# EAGLE board 14119-ESP32_LoRa_1_Channel_Gateway-Panel (EAGLE 9.1.0), part 1 of 4
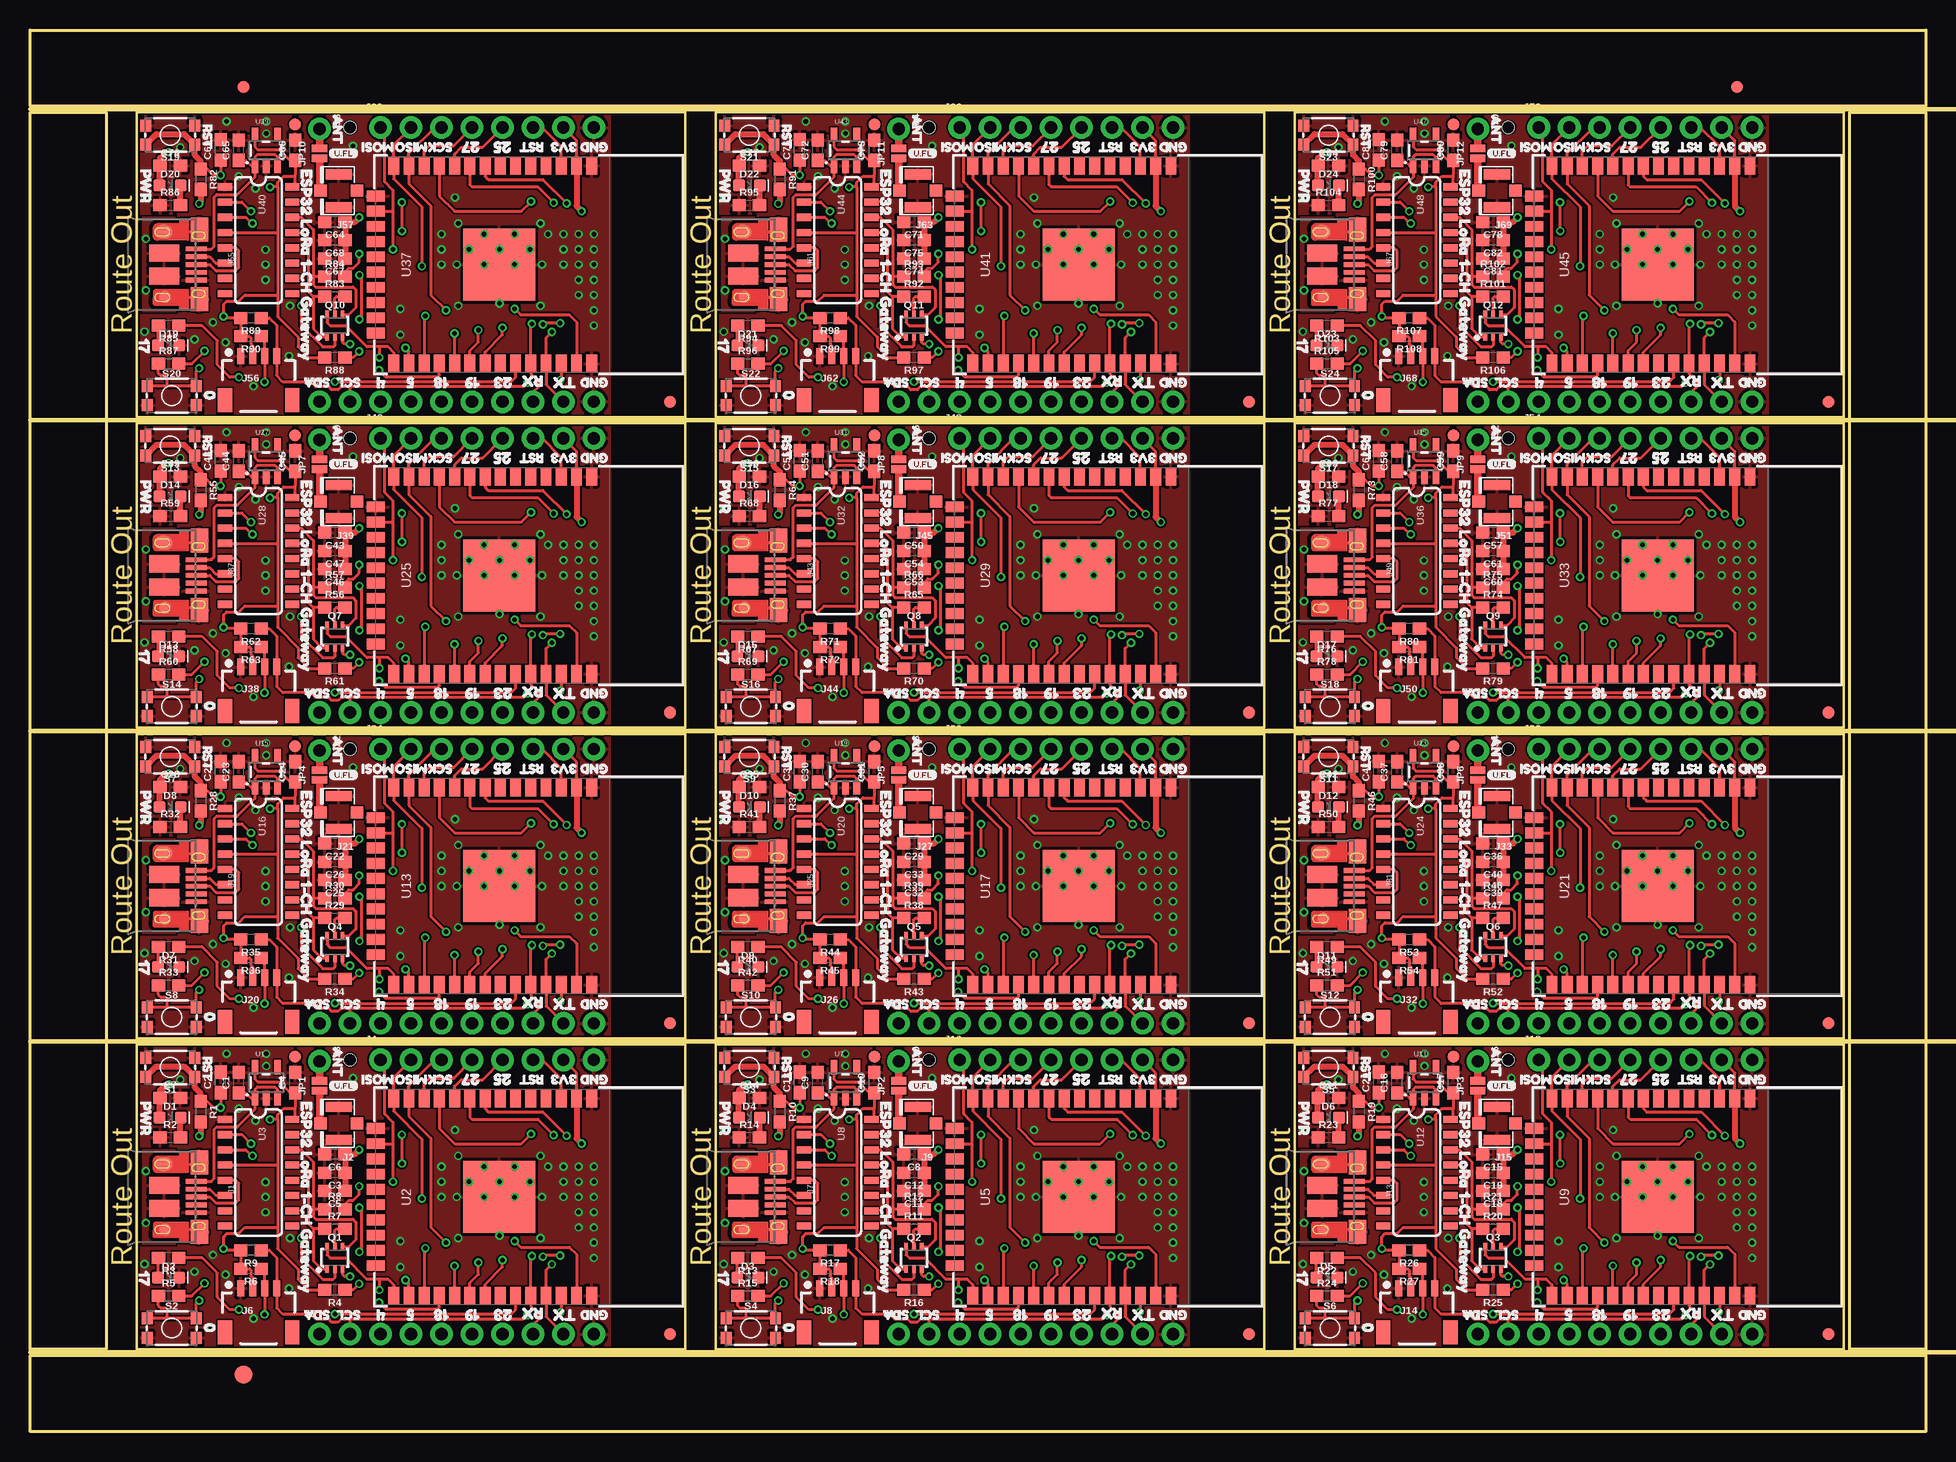
[diagram p0: board, top side]
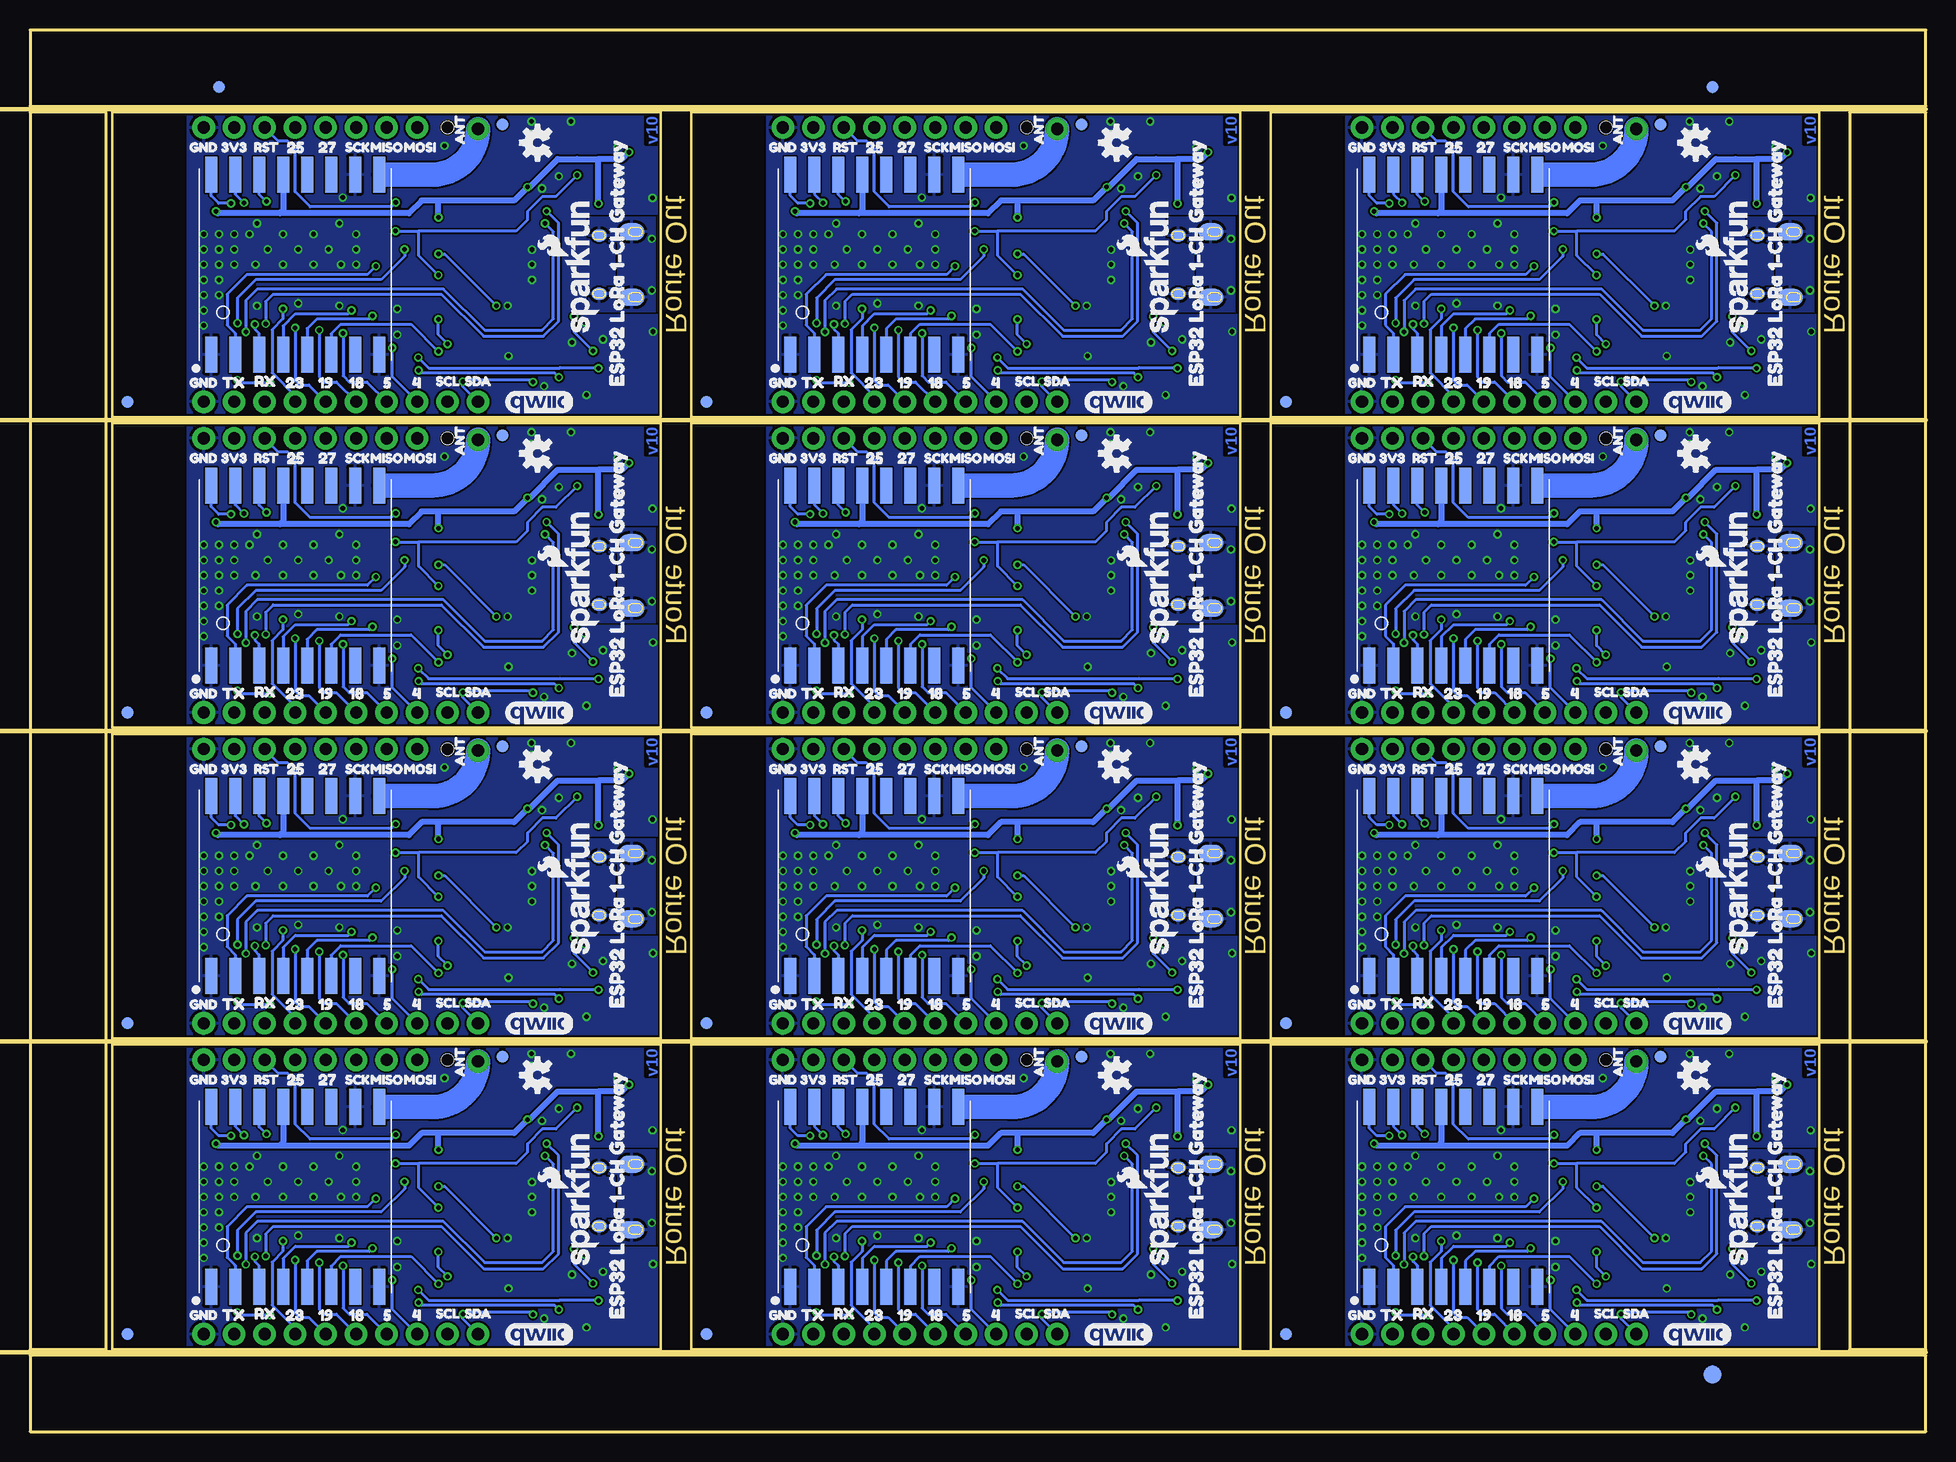
[diagram p1: board, bottom side, seen from below]

Size 157.99 x 116.84 mm. Coordinates in mm from the lower left corner, seen from the top.
Outline: 8.89,32.26 8.89,6.88 54.61,6.86 54.61,32.26 8.89,32.26
Outline: 57.15,32.26 57.15,6.88 102.87,6.86 102.87,32.26 57.15,32.26
Outline: 105.41,32.26 105.41,6.88 151.13,6.86 151.13,32.26 105.41,32.26
Outline: 8.89,58.17 8.89,32.79 54.61,32.77 54.61,58.17 8.89,58.17
Outline: 57.15,58.17 57.15,32.79 102.87,32.77 102.87,58.17 57.15,58.17
Outline: 105.41,58.17 105.41,32.79 151.13,32.77 151.13,58.17 105.41,58.17
Outline: 8.89,84.07 8.89,58.69 54.61,58.67 54.61,84.07 8.89,84.07
Outline: 57.15,84.07 57.15,58.69 102.87,58.67 102.87,84.07 57.15,84.07
Outline: 105.41,84.07 105.41,58.69 151.13,58.67 151.13,84.07 105.41,84.07
Outline: 8.89,109.98 8.89,84.6 54.61,84.58 54.61,109.98 8.89,109.98
Outline: 57.15,109.98 57.15,84.6 102.87,84.58 102.87,109.98 57.15,109.98
Outline: 105.41,109.98 105.41,84.6 151.13,84.58 151.13,109.98 105.41,109.98
Outline: 0,6.35 157.99,6.35 157.99,0 0,0 0,6.35
Outline: 151.64,109.98 157.99,109.98 157.99,6.86 151.64,6.86 151.64,109.98
Outline: 0,116.84 157.99,116.84 157.99,110.49 0,110.49 0,116.84
Outline: 0,109.98 6.35,109.98 6.35,6.86 0,6.86 0,109.98
Copper layers (1*16): Top 0.035mm / dielectric 1.5mm / Bottom 0.035mm
Design rules "SparkFun-2-layer-PCBWay-LIMIT": minimum track width 6mil, minimum drill 0.3mm, track to track 6mil, track to pad 6mil, pad to pad 6mil, via to via 6mil, smd to smd 6mil, copper to edge 6mil, drill to drill 6mil, minimum pad ring 6mil, minimum via ring 6mil, stop-mask expansion 4mil, vias tented up to drill 25mil, thermal gap 10mil
Net classes: 0 default: width 0.152 mm, drill 0.305 mm
Holes 1.02 mm at 26.67,30.99 74.93,30.99 123.19,30.99 26.67,56.9 74.93,56.9 123.19,56.9 26.67,82.8 74.93,82.8 123.19,82.8 26.67,108.71 74.93,108.71 123.19,108.71
Milling: 5 lines

## Footprints (pad centres in the part's own frame; a part is rotated, then mirrored left to right if it is on the bottom)
0603 = smd 1.1 x 1: 1 -0.85,0; 2 0.85,0
LED-0603 = smd 1 x 1: A -0.877,0; C 0.877,0
FIDUCIAL-1X2 = smd 1 x 1: 1 0,0
FIDUCIAL-1.5X3 = smd 1.5 x 1.5: 1 0,0
USB-MICROB-PTH-MILL = smd 0.4 x 1.75: D+ 0,0; D- -0.65,0; GND 1.3,0; ID 0.65,0; VBUS -1.3,0 | smd 2 x 1.46: SHIELD -2.9,0.275; SHIELD2 2.9,0.275 | smd 1.425 x 2.5: SHIELD3 -0.963,-2.675; SHIELD4 0.963,-2.675 | smd 1.4 x 2.1 bottom: SHIELD5 -2.731,-2.531; SHIELD7 2.729,-2.531 | smd 1 x 1: SHIELD6 2.7,-2.575 | smd 1.1 x 1.5: SHIELD8 -2.731,-2.731 | smd 1 x 1.3 bottom: SHIELD9 -2.43,0.195; SHIELD10 2.43,0.195
U.FL = smd 2.2 x 0.85: 1 0,1.375; 2 0,-1.375 | smd 1.05 x 1: FEED 1.525,0; NC -1.525,0
1X01_NO_SILK = drill 1.016 pad 1.88: 1 0,0
1X08_NO_SILK = drill 1.016 pad 1.88: 1 0,0; 2 2.54,0; 3 5.08,0; 4 7.62,0; 5 10.16,0; 6 12.7,0; 7 15.24,0; 8 17.78,0
1X10_NO_SILK = drill 1.016 pad 1.88: 1 0,0; 2 2.54,0; 3 5.08,0; 4 7.62,0; 5 10.16,0; 6 12.7,0; 7 15.24,0; 8 17.78,0; 9 20.32,0; 10 22.86,0
1X04_1MM_RA = smd 0.6 x 1.35: 1 -1.5,0; 2 -0.5,0; 3 0.5,0; 4 1.5,0 | smd 1.2 x 2: NC1 2.8,-3.675; NC2 -2.8,-3.675
SMT-JUMPER_2_NO_NO-SILK = smd 0.635 x 1.27: 1 -0.406,0; 2 0.406,0
SC70-6 = smd 0.3 x 0.66: 1 -0.65,-0.92; 2 0,-0.92; 3 0.65,-0.92; 4 0.65,0.92; 5 0,0.92; 6 -0.65,0.92
TACTILE_SWITCH_SMD_4.6X2.8MM = smd 0.9 x 1: 1 -2.05,-0.8; 2 2.05,-0.8; 3 2.05,0.8; 4 -2.05,0.8
SOT23-5 = smd 0.55 x 1.2: 1 -0.95,-1.3; 2 0,-1.3; 3 0.95,-1.3; 4 0.95,1.3; 5 -0.95,1.3
ESP-WROOM-32-NARROW = smd 0.9 x 1.5: 1 6.43,8.238; 2 5.16,8.238; 3 3.89,8.238; 4 2.62,8.238; 5 1.35,8.238; 6 0.08,8.238; 7 -1.19,8.238; 8 -2.46,8.238; 9 -3.73,8.238; 10 -5,8.238; 11 -6.27,8.238; 12 -7.54,8.238; 13 -8.81,8.238; 14 -10.08,8.238; 25 -10.08,-8.238; 26 -8.81,-8.238; 27 -7.54,-8.238; 28 -6.27,-8.238; 29 -5,-8.238; 30 -3.73,-8.238; 31 -2.46,-8.238; 32 -1.19,-8.238; 33 0.08,-8.238; 34 1.35,-8.238; 35 2.62,-8.238; 36 3.89,-8.238; 37 5.16,-8.238; 38 6.43,-8.238 | smd 1.5 x 0.9: 15 -11.57,5.715; 16 -11.57,4.445; 17 -11.57,3.175; 18 -11.57,1.905; 19 -11.57,0.635; 20 -11.57,-0.635; 21 -11.57,-1.905; 22 -11.57,-3.175; 23 -11.57,-4.445; 24 -11.57,-5.715 | smd 6 x 6: GND -1.27,0
SO016 = smd 0.6 x 1.2: 1 -4.445,-2.8; 2 -3.175,-2.8; 3 -1.905,-2.8; 4 -0.635,-2.8; 5 0.635,-2.8; 6 1.905,-2.8; 7 3.175,-2.8; 8 4.445,-2.8; 9 4.445,2.8; 10 3.175,2.8; 11 1.905,2.8; 12 0.635,2.8; 13 -0.635,2.8; 14 -1.905,2.8; 15 -3.175,2.8; 16 -4.445,2.8
RFM95/96/97/98W = smd 3 x 1: 3.3V 7.5,1; !RESET -7.5,-3; ANT 7.5,-7; DIO0 7.5,3; DIO1 7.5,5; DIO2 7.5,7; DIO3 7.5,-3; DIO4 7.5,-1; DIO5 -7.5,-5; GND@1 -7.5,7; GND@2 -7.5,-7; GND@3 7.5,-5; MISO -7.5,5; MOSI -7.5,3; NSS -7.5,-1; SCK -7.5,1

## Placement (x,y rotation side)
C1  1.0uF  [0603]  17.4,29.08 90 top
C2  0.1uF  [0603]  15.88,29.11 90 top
C3  0.1uF  [0603]  25.4,21.59 180 top
C4  1.0uF  [0603]  22.1,29.08 90 top
C5  10uF  [0603]  25.4,20.07 180 top
C6  4.7uF  [0603]  25.4,23.11 180 top
C7  0.1uF  [0603]  11.68,27.81 0 top
C8  4.7uF  [0603]  73.66,23.11 180 top
C9  1.0uF  [0603]  65.66,29.08 90 top
C10  1.0uF  [0603]  70.36,29.08 90 top
C11  10uF  [0603]  73.66,20.07 180 top
C12  0.1uF  [0603]  73.66,21.59 180 top
C13  0.1uF  [0603]  64.13,29.11 90 top
C14  0.1uF  [0603]  59.94,27.81 0 top
C15  4.7uF  [0603]  121.92,23.11 180 top
C16  1.0uF  [0603]  113.92,29.08 90 top
C17  1.0uF  [0603]  118.62,29.08 90 top
C18  10uF  [0603]  121.92,20.07 180 top
C19  0.1uF  [0603]  121.92,21.59 180 top
C20  0.1uF  [0603]  112.39,29.11 90 top
C21  0.1uF  [0603]  108.2,27.81 0 top
C22  4.7uF  [0603]  25.4,49.02 180 top
C23  1.0uF  [0603]  17.4,54.99 90 top
C24  1.0uF  [0603]  22.1,54.99 90 top
C25  10uF  [0603]  25.4,45.97 180 top
C26  0.1uF  [0603]  25.4,47.5 180 top
C27  0.1uF  [0603]  15.88,55.02 90 top
C28  0.1uF  [0603]  11.68,53.72 0 top
C29  4.7uF  [0603]  73.66,49.02 180 top
C30  1.0uF  [0603]  65.66,54.99 90 top
C31  1.0uF  [0603]  70.36,54.99 90 top
C32  10uF  [0603]  73.66,45.97 180 top
C33  0.1uF  [0603]  73.66,47.5 180 top
C34  0.1uF  [0603]  64.13,55.02 90 top
C35  0.1uF  [0603]  59.94,53.72 0 top
C36  4.7uF  [0603]  121.92,49.02 180 top
C37  1.0uF  [0603]  113.92,54.99 90 top
C38  1.0uF  [0603]  118.62,54.99 90 top
C39  10uF  [0603]  121.92,45.97 180 top
C40  0.1uF  [0603]  121.92,47.5 180 top
C41  0.1uF  [0603]  112.39,55.02 90 top
C42  0.1uF  [0603]  108.2,53.72 0 top
C43  4.7uF  [0603]  25.4,74.93 180 top
C44  1.0uF  [0603]  17.4,80.9 90 top
C45  1.0uF  [0603]  22.1,80.9 90 top
C46  10uF  [0603]  25.4,71.88 180 top
C47  0.1uF  [0603]  25.4,73.41 180 top
C48  0.1uF  [0603]  15.88,80.92 90 top
C49  0.1uF  [0603]  11.68,79.63 0 top
C50  4.7uF  [0603]  73.66,74.93 180 top
C51  1.0uF  [0603]  65.66,80.9 90 top
C52  1.0uF  [0603]  70.36,80.9 90 top
C53  10uF  [0603]  73.66,71.88 180 top
C54  0.1uF  [0603]  73.66,73.41 180 top
C55  0.1uF  [0603]  64.13,80.92 90 top
C56  0.1uF  [0603]  59.94,79.63 0 top
C57  4.7uF  [0603]  121.92,74.93 180 top
C58  1.0uF  [0603]  113.92,80.9 90 top
C59  1.0uF  [0603]  118.62,80.9 90 top
C60  10uF  [0603]  121.92,71.88 180 top
C61  0.1uF  [0603]  121.92,73.41 180 top
C62  0.1uF  [0603]  112.39,80.92 90 top
C63  0.1uF  [0603]  108.2,79.63 0 top
C64  4.7uF  [0603]  25.4,100.84 180 top
C65  1.0uF  [0603]  17.4,106.81 90 top
C66  1.0uF  [0603]  22.1,106.81 90 top
C67  10uF  [0603]  25.4,97.79 180 top
C68  0.1uF  [0603]  25.4,99.31 180 top
C69  0.1uF  [0603]  15.88,106.83 90 top
C70  0.1uF  [0603]  11.68,105.54 0 top
C71  4.7uF  [0603]  73.66,100.84 180 top
C72  1.0uF  [0603]  65.66,106.81 90 top
C73  1.0uF  [0603]  70.36,106.81 90 top
C74  10uF  [0603]  73.66,97.79 180 top
C75  0.1uF  [0603]  73.66,99.31 180 top
C76  0.1uF  [0603]  64.13,106.83 90 top
C77  0.1uF  [0603]  59.94,105.54 0 top
C78  4.7uF  [0603]  121.92,100.84 180 top
C79  1.0uF  [0603]  113.92,106.81 90 top
C80  1.0uF  [0603]  118.62,106.81 90 top
C81  10uF  [0603]  121.92,97.79 180 top
C82  0.1uF  [0603]  121.92,99.31 180 top
C83  0.1uF  [0603]  112.39,106.83 90 top
C84  0.1uF  [0603]  108.2,105.54 0 top
D1  RED  [LED-0603]  11.68,26.16 0 top
D2  BLUE  [LED-0603]  11.56,12.83 0 top
D3  BLUE  [LED-0603]  59.82,12.83 0 top
D4  RED  [LED-0603]  59.94,26.16 0 top
D5  BLUE  [LED-0603]  108.08,12.83 0 top
D6  RED  [LED-0603]  108.2,26.16 0 top
D7  BLUE  [LED-0603]  11.56,38.73 0 top
D8  RED  [LED-0603]  11.68,52.07 0 top
D9  BLUE  [LED-0603]  59.82,38.73 0 top
D10  RED  [LED-0603]  59.94,52.07 0 top
D11  BLUE  [LED-0603]  108.08,38.73 0 top
D12  RED  [LED-0603]  108.2,52.07 0 top
D13  BLUE  [LED-0603]  11.56,64.64 0 top
D14  RED  [LED-0603]  11.68,77.98 0 top
D15  BLUE  [LED-0603]  59.82,64.64 0 top
D16  RED  [LED-0603]  59.94,77.98 0 top
D17  BLUE  [LED-0603]  108.08,64.64 0 top
D18  RED  [LED-0603]  108.2,77.98 0 top
D19  BLUE  [LED-0603]  11.56,90.55 0 top
D20  RED  [LED-0603]  11.68,103.89 0 top
D21  BLUE  [LED-0603]  59.82,90.55 0 top
D22  RED  [LED-0603]  59.94,103.89 0 top
D23  BLUE  [LED-0603]  108.08,90.55 0 top
D24  RED  [LED-0603]  108.2,103.89 0 top
E$1  [FIDUCIAL-1X2]  17.78,112.08 0 top
E$2  [FIDUCIAL-1X2]  17.78,112.08 0 bottom
E$3  [FIDUCIAL-1X2]  142.24,112.08 0 top
E$4  [FIDUCIAL-1X2]  142.24,112.08 0 bottom
E$5  [FIDUCIAL-1.5X3]  17.78,4.76 0 top
E$6  [FIDUCIAL-1.5X3]  17.78,4.76 0 bottom
FD1  FIDUCIAL1X2  [FIDUCIAL-1X2]  53.34,8.13 90 bottom
FD2  FIDUCIAL1X2  [FIDUCIAL-1X2]  22.1,31.24 270 top
FD3  FIDUCIAL1X2  [FIDUCIAL-1X2]  53.34,8.13 270 top
FD4  FIDUCIAL1X2  [FIDUCIAL-1X2]  22.1,31.24 90 bottom
FD5  FIDUCIAL1X2  [FIDUCIAL-1X2]  101.6,8.13 270 top
FD6  FIDUCIAL1X2  [FIDUCIAL-1X2]  101.6,8.13 90 bottom
FD7  FIDUCIAL1X2  [FIDUCIAL-1X2]  70.36,31.24 270 top
FD8  FIDUCIAL1X2  [FIDUCIAL-1X2]  70.36,31.24 90 bottom
FD9  FIDUCIAL1X2  [FIDUCIAL-1X2]  149.86,8.13 270 top
FD10  FIDUCIAL1X2  [FIDUCIAL-1X2]  149.86,8.13 90 bottom
FD11  FIDUCIAL1X2  [FIDUCIAL-1X2]  118.62,31.24 270 top
FD12  FIDUCIAL1X2  [FIDUCIAL-1X2]  118.62,31.24 90 bottom
FD13  FIDUCIAL1X2  [FIDUCIAL-1X2]  53.34,34.04 270 top
FD14  FIDUCIAL1X2  [FIDUCIAL-1X2]  53.34,34.04 90 bottom
FD15  FIDUCIAL1X2  [FIDUCIAL-1X2]  22.1,57.15 270 top
FD16  FIDUCIAL1X2  [FIDUCIAL-1X2]  22.1,57.15 90 bottom
FD17  FIDUCIAL1X2  [FIDUCIAL-1X2]  101.6,34.04 270 top
FD18  FIDUCIAL1X2  [FIDUCIAL-1X2]  101.6,34.04 90 bottom
FD19  FIDUCIAL1X2  [FIDUCIAL-1X2]  70.36,57.15 270 top
FD20  FIDUCIAL1X2  [FIDUCIAL-1X2]  70.36,57.15 90 bottom
FD21  FIDUCIAL1X2  [FIDUCIAL-1X2]  149.86,34.04 270 top
FD22  FIDUCIAL1X2  [FIDUCIAL-1X2]  149.86,34.04 90 bottom
FD23  FIDUCIAL1X2  [FIDUCIAL-1X2]  118.62,57.15 270 top
FD24  FIDUCIAL1X2  [FIDUCIAL-1X2]  118.62,57.15 90 bottom
FD25  FIDUCIAL1X2  [FIDUCIAL-1X2]  53.34,59.94 270 top
FD26  FIDUCIAL1X2  [FIDUCIAL-1X2]  53.34,59.94 90 bottom
FD27  FIDUCIAL1X2  [FIDUCIAL-1X2]  22.1,83.06 270 top
FD28  FIDUCIAL1X2  [FIDUCIAL-1X2]  22.1,83.06 90 bottom
FD29  FIDUCIAL1X2  [FIDUCIAL-1X2]  101.6,59.94 270 top
FD30  FIDUCIAL1X2  [FIDUCIAL-1X2]  101.6,59.94 90 bottom
FD31  FIDUCIAL1X2  [FIDUCIAL-1X2]  70.36,83.06 270 top
FD32  FIDUCIAL1X2  [FIDUCIAL-1X2]  70.36,83.06 90 bottom
FD33  FIDUCIAL1X2  [FIDUCIAL-1X2]  149.86,59.94 270 top
FD34  FIDUCIAL1X2  [FIDUCIAL-1X2]  149.86,59.94 90 bottom
FD35  FIDUCIAL1X2  [FIDUCIAL-1X2]  118.62,83.06 270 top
FD36  FIDUCIAL1X2  [FIDUCIAL-1X2]  118.62,83.06 90 bottom
FD37  FIDUCIAL1X2  [FIDUCIAL-1X2]  53.34,85.85 270 top
FD38  FIDUCIAL1X2  [FIDUCIAL-1X2]  53.34,85.85 90 bottom
FD39  FIDUCIAL1X2  [FIDUCIAL-1X2]  22.1,108.97 270 top
FD40  FIDUCIAL1X2  [FIDUCIAL-1X2]  22.1,108.97 90 bottom
FD41  FIDUCIAL1X2  [FIDUCIAL-1X2]  101.6,85.85 270 top
FD42  FIDUCIAL1X2  [FIDUCIAL-1X2]  101.6,85.85 90 bottom
FD43  FIDUCIAL1X2  [FIDUCIAL-1X2]  70.36,108.97 270 top
FD44  FIDUCIAL1X2  [FIDUCIAL-1X2]  70.36,108.97 90 bottom
FD45  FIDUCIAL1X2  [FIDUCIAL-1X2]  149.86,85.85 270 top
FD46  FIDUCIAL1X2  [FIDUCIAL-1X2]  149.86,85.85 90 bottom
FD47  FIDUCIAL1X2  [FIDUCIAL-1X2]  118.62,108.97 270 top
FD48  FIDUCIAL1X2  [FIDUCIAL-1X2]  118.62,108.97 90 bottom
J1  USB  [USB-MICROB-PTH-MILL]  13.84,19.56 270 top
J2  U.FL  [U.FL]  25.73,25.7 180 top
J3  [1X01_NO_SILK]  24.13,30.86 270 top
J4  [1X08_NO_SILK]  29.21,30.99 0 top
J5  [1X10_NO_SILK]  24.13,8.13 0 top
J6  QWIIC  [1X04_1MM_RA]  19.05,11.94 0 top
J7  USB  [USB-MICROB-PTH-MILL]  62.1,19.56 270 top
J8  QWIIC  [1X04_1MM_RA]  67.31,11.94 0 top
J9  U.FL  [U.FL]  73.99,25.7 180 top
J10  [1X01_NO_SILK]  72.39,30.86 270 top
J11  [1X10_NO_SILK]  72.39,8.13 0 top
J12  [1X08_NO_SILK]  77.47,30.99 0 top
J13  USB  [USB-MICROB-PTH-MILL]  110.36,19.56 270 top
J14  QWIIC  [1X04_1MM_RA]  115.57,11.94 0 top
J15  U.FL  [U.FL]  122.25,25.7 180 top
J16  [1X01_NO_SILK]  120.65,30.86 270 top
J17  [1X10_NO_SILK]  120.65,8.13 0 top
J18  [1X08_NO_SILK]  125.73,30.99 0 top
J19  USB  [USB-MICROB-PTH-MILL]  13.84,45.47 270 top
J20  QWIIC  [1X04_1MM_RA]  19.05,37.85 0 top
J21  U.FL  [U.FL]  25.73,51.61 180 top
J22  [1X01_NO_SILK]  24.13,56.77 270 top
J23  [1X10_NO_SILK]  24.13,34.04 0 top
J24  [1X08_NO_SILK]  29.21,56.9 0 top
J25  USB  [USB-MICROB-PTH-MILL]  62.1,45.47 270 top
J26  QWIIC  [1X04_1MM_RA]  67.31,37.85 0 top
J27  U.FL  [U.FL]  73.99,51.61 180 top
J28  [1X01_NO_SILK]  72.39,56.77 270 top
J29  [1X10_NO_SILK]  72.39,34.04 0 top
J30  [1X08_NO_SILK]  77.47,56.9 0 top
J31  USB  [USB-MICROB-PTH-MILL]  110.36,45.47 270 top
J32  QWIIC  [1X04_1MM_RA]  115.57,37.85 0 top
J33  U.FL  [U.FL]  122.25,51.61 180 top
J34  [1X01_NO_SILK]  120.65,56.77 270 top
J35  [1X10_NO_SILK]  120.65,34.04 0 top
J36  [1X08_NO_SILK]  125.73,56.9 0 top
J37  USB  [USB-MICROB-PTH-MILL]  13.84,71.37 270 top
J38  QWIIC  [1X04_1MM_RA]  19.05,63.75 0 top
J39  U.FL  [U.FL]  25.73,77.52 180 top
J40  [1X01_NO_SILK]  24.13,82.68 270 top
J41  [1X10_NO_SILK]  24.13,59.94 0 top
J42  [1X08_NO_SILK]  29.21,82.8 0 top
J43  USB  [USB-MICROB-PTH-MILL]  62.1,71.37 270 top
J44  QWIIC  [1X04_1MM_RA]  67.31,63.75 0 top
J45  U.FL  [U.FL]  73.99,77.52 180 top
J46  [1X01_NO_SILK]  72.39,82.68 270 top
J47  [1X10_NO_SILK]  72.39,59.94 0 top
J48  [1X08_NO_SILK]  77.47,82.8 0 top
J49  USB  [USB-MICROB-PTH-MILL]  110.36,71.37 270 top
J50  QWIIC  [1X04_1MM_RA]  115.57,63.75 0 top
J51  U.FL  [U.FL]  122.25,77.52 180 top
J52  [1X01_NO_SILK]  120.65,82.68 270 top
J53  [1X10_NO_SILK]  120.65,59.94 0 top
J54  [1X08_NO_SILK]  125.73,82.8 0 top
J55  USB  [USB-MICROB-PTH-MILL]  13.84,97.28 270 top
J56  QWIIC  [1X04_1MM_RA]  19.05,89.66 0 top
J57  U.FL  [U.FL]  25.73,103.43 180 top
J58  [1X01_NO_SILK]  24.13,108.59 270 top
J59  [1X10_NO_SILK]  24.13,85.85 0 top
J60  [1X08_NO_SILK]  29.21,108.71 0 top
J61  USB  [USB-MICROB-PTH-MILL]  62.1,97.28 270 top
J62  QWIIC  [1X04_1MM_RA]  67.31,89.66 0 top
J63  U.FL  [U.FL]  73.99,103.43 180 top
J64  [1X01_NO_SILK]  72.39,108.59 270 top
J65  [1X10_NO_SILK]  72.39,85.85 0 top
J66  [1X08_NO_SILK]  77.47,108.71 0 top
J67  USB  [USB-MICROB-PTH-MILL]  110.36,97.28 270 top
J68  QWIIC  [1X04_1MM_RA]  115.57,89.66 0 top
J69  U.FL  [U.FL]  122.25,103.43 180 top
J70  [1X01_NO_SILK]  120.65,108.59 270 top
J71  [1X10_NO_SILK]  120.65,85.85 0 top
J72  [1X08_NO_SILK]  125.73,108.71 0 top
JP1  Ant Sel  [SMT-JUMPER_2_NO_NO-SILK]  24.13,28.83 90 top
JP2  Ant Sel  [SMT-JUMPER_2_NO_NO-SILK]  72.39,28.83 90 top
JP3  Ant Sel  [SMT-JUMPER_2_NO_NO-SILK]  120.65,28.83 90 top
JP4  Ant Sel  [SMT-JUMPER_2_NO_NO-SILK]  24.13,54.74 90 top
JP5  Ant Sel  [SMT-JUMPER_2_NO_NO-SILK]  72.39,54.74 90 top
JP6  Ant Sel  [SMT-JUMPER_2_NO_NO-SILK]  120.65,54.74 90 top
JP7  Ant Sel  [SMT-JUMPER_2_NO_NO-SILK]  24.13,80.65 90 top
JP8  Ant Sel  [SMT-JUMPER_2_NO_NO-SILK]  72.39,80.65 90 top
JP9  Ant Sel  [SMT-JUMPER_2_NO_NO-SILK]  120.65,80.65 90 top
JP10  Ant Sel  [SMT-JUMPER_2_NO_NO-SILK]  24.13,106.55 90 top
JP11  Ant Sel  [SMT-JUMPER_2_NO_NO-SILK]  72.39,106.55 90 top
JP12  Ant Sel  [SMT-JUMPER_2_NO_NO-SILK]  120.65,106.55 90 top
LOGO1  OSHW-LOGOS  [OSHW-LOGO-S]  67.44,29.72 90 bottom
LOGO2  SFE_LOGO_NAME_FLAME.1_INCH  [SFE_LOGO_NAME_FLAME_.1]  13.97,13.46 90 bottom
LOGO3  OSHW-LOGOS  [OSHW-LOGO-S]  19.18,29.72 90 bottom
LOGO4  SFE_LOGO_NAME_FLAME.1_INCH  [SFE_LOGO_NAME_FLAME_.1]  62.23,13.46 90 bottom
LOGO5  OSHW-LOGOS  [OSHW-LOGO-S]  115.7,29.72 90 bottom
LOGO6  SFE_LOGO_NAME_FLAME.1_INCH  [SFE_LOGO_NAME_FLAME_.1]  110.49,13.46 90 bottom
LOGO7  OSHW-LOGOS  [OSHW-LOGO-S]  19.18,55.63 90 bottom
LOGO8  SFE_LOGO_NAME_FLAME.1_INCH  [SFE_LOGO_NAME_FLAME_.1]  13.97,39.37 90 bottom
LOGO9  OSHW-LOGOS  [OSHW-LOGO-S]  67.44,55.63 90 bottom
LOGO10  SFE_LOGO_NAME_FLAME.1_INCH  [SFE_LOGO_NAME_FLAME_.1]  62.23,39.37 90 bottom
LOGO11  OSHW-LOGOS  [OSHW-LOGO-S]  115.7,55.63 90 bottom
LOGO12  SFE_LOGO_NAME_FLAME.1_INCH  [SFE_LOGO_NAME_FLAME_.1]  110.49,39.37 90 bottom
LOGO13  OSHW-LOGOS  [OSHW-LOGO-S]  19.18,81.53 90 bottom
LOGO14  SFE_LOGO_NAME_FLAME.1_INCH  [SFE_LOGO_NAME_FLAME_.1]  13.97,65.28 90 bottom
LOGO15  OSHW-LOGOS  [OSHW-LOGO-S]  67.44,81.53 90 bottom
LOGO16  SFE_LOGO_NAME_FLAME.1_INCH  [SFE_LOGO_NAME_FLAME_.1]  62.23,65.28 90 bottom
LOGO17  OSHW-LOGOS  [OSHW-LOGO-S]  115.7,81.53 90 bottom
LOGO18  SFE_LOGO_NAME_FLAME.1_INCH  [SFE_LOGO_NAME_FLAME_.1]  110.49,65.28 90 bottom
LOGO19  OSHW-LOGOS  [OSHW-LOGO-S]  19.18,107.44 90 bottom
LOGO20  SFE_LOGO_NAME_FLAME.1_INCH  [SFE_LOGO_NAME_FLAME_.1]  13.97,91.19 90 bottom
LOGO21  OSHW-LOGOS  [OSHW-LOGO-S]  67.44,107.44 90 bottom
LOGO22  SFE_LOGO_NAME_FLAME.1_INCH  [SFE_LOGO_NAME_FLAME_.1]  62.23,91.19 90 bottom
LOGO23  OSHW-LOGOS  [OSHW-LOGO-S]  115.7,107.44 90 bottom
LOGO24  SFE_LOGO_NAME_FLAME.1_INCH  [SFE_LOGO_NAME_FLAME_.1]  110.49,91.19 90 bottom
Q1  MBT3904DW1T1  [SC70-6]  25.4,14.48 0 top
Q2  MBT3904DW1T1  [SC70-6]  73.66,14.48 0 top
Q3  MBT3904DW1T1  [SC70-6]  121.92,14.48 0 top
Q4  MBT3904DW1T1  [SC70-6]  25.4,40.39 0 top
Q5  MBT3904DW1T1  [SC70-6]  73.66,40.39 0 top
Q6  MBT3904DW1T1  [SC70-6]  121.92,40.39 0 top
Q7  MBT3904DW1T1  [SC70-6]  25.4,66.29 0 top
Q8  MBT3904DW1T1  [SC70-6]  73.66,66.29 0 top
Q9  MBT3904DW1T1  [SC70-6]  121.92,66.29 0 top
Q10  MBT3904DW1T1  [SC70-6]  25.4,92.2 0 top
Q11  MBT3904DW1T1  [SC70-6]  73.66,92.2 0 top
Q12  MBT3904DW1T1  [SC70-6]  121.92,92.2 0 top
R1  10k  [0603]  14.22,26.67 270 top
R2  1k  [0603]  11.68,24.51 0 top
R3  1k  [0603]  11.56,14.48 180 top
R4  10k  [0603]  25.4,11.81 180 top
R5  10k  [0603]  11.56,11.3 0 top
R6  2.2k  [0603]  18.41,13.59 180 top
R7  10k  [0603]  25.4,16.89 0 top
R8  10k  [0603]  25.4,18.54 0 top
R9  2.2k  [0603]  18.41,15.11 180 top
R10  10k  [0603]  62.48,26.67 270 top
R11  10k  [0603]  73.66,16.89 0 top
R12  10k  [0603]  73.66,18.54 0 top
R13  1k  [0603]  59.82,14.48 180 top
R14  1k  [0603]  59.94,24.51 0 top
R15  10k  [0603]  59.82,11.3 0 top
R16  10k  [0603]  73.66,11.81 180 top
R17  2.2k  [0603]  66.67,15.11 180 top
R18  2.2k  [0603]  66.67,13.59 180 top
R19  10k  [0603]  110.74,26.67 270 top
R20  10k  [0603]  121.92,16.89 0 top
R21  10k  [0603]  121.92,18.54 0 top
R22  1k  [0603]  108.08,14.48 180 top
R23  1k  [0603]  108.2,24.51 0 top
R24  10k  [0603]  108.08,11.3 0 top
R25  10k  [0603]  121.92,11.81 180 top
R26  2.2k  [0603]  114.94,15.11 180 top
R27  2.2k  [0603]  114.94,13.59 180 top
R28  10k  [0603]  14.22,52.58 270 top
R29  10k  [0603]  25.4,42.8 0 top
R30  10k  [0603]  25.4,44.45 0 top
R31  1k  [0603]  11.56,40.39 180 top
R32  1k  [0603]  11.68,50.42 0 top
R33  10k  [0603]  11.56,37.21 0 top
R34  10k  [0603]  25.4,37.72 180 top
R35  2.2k  [0603]  18.41,41.02 180 top
R36  2.2k  [0603]  18.41,39.5 180 top
R37  10k  [0603]  62.48,52.58 270 top
R38  10k  [0603]  73.66,42.8 0 top
R39  10k  [0603]  73.66,44.45 0 top
R40  1k  [0603]  59.82,40.39 180 top
R41  1k  [0603]  59.94,50.42 0 top
R42  10k  [0603]  59.82,37.21 0 top
R43  10k  [0603]  73.66,37.72 180 top
R44  2.2k  [0603]  66.67,41.02 180 top
R45  2.2k  [0603]  66.67,39.5 180 top
R46  10k  [0603]  110.74,52.58 270 top
R47  10k  [0603]  121.92,42.8 0 top
R48  10k  [0603]  121.92,44.45 0 top
R49  1k  [0603]  108.08,40.39 180 top
R50  1k  [0603]  108.2,50.42 0 top
R51  10k  [0603]  108.08,37.21 0 top
R52  10k  [0603]  121.92,37.72 180 top
R53  2.2k  [0603]  114.94,41.02 180 top
R54  2.2k  [0603]  114.94,39.5 180 top
R55  10k  [0603]  14.22,78.49 270 top
R56  10k  [0603]  25.4,68.71 0 top
R57  10k  [0603]  25.4,70.36 0 top
R58  1k  [0603]  11.56,66.29 180 top
R59  1k  [0603]  11.68,76.33 0 top
R60  10k  [0603]  11.56,63.12 0 top
R61  10k  [0603]  25.4,63.63 180 top
R62  2.2k  [0603]  18.41,66.93 180 top
R63  2.2k  [0603]  18.41,65.41 180 top
R64  10k  [0603]  62.48,78.49 270 top
R65  10k  [0603]  73.66,68.71 0 top
R66  10k  [0603]  73.66,70.36 0 top
R67  1k  [0603]  59.82,66.29 180 top
R68  1k  [0603]  59.94,76.33 0 top
R69  10k  [0603]  59.82,63.12 0 top
R70  10k  [0603]  73.66,63.63 180 top
R71  2.2k  [0603]  66.67,66.93 180 top
R72  2.2k  [0603]  66.67,65.41 180 top
R73  10k  [0603]  110.74,78.49 270 top
R74  10k  [0603]  121.92,68.71 0 top
R75  10k  [0603]  121.92,70.36 0 top
R76  1k  [0603]  108.08,66.29 180 top
R77  1k  [0603]  108.2,76.33 0 top
R78  10k  [0603]  108.08,63.12 0 top
R79  10k  [0603]  121.92,63.63 180 top
R80  2.2k  [0603]  114.94,66.93 180 top
R81  2.2k  [0603]  114.94,65.41 180 top
R82  10k  [0603]  14.22,104.39 270 top
R83  10k  [0603]  25.4,94.62 0 top
R84  10k  [0603]  25.4,96.27 0 top
R85  1k  [0603]  11.56,92.2 180 top
R86  1k  [0603]  11.68,102.23 0 top
R87  10k  [0603]  11.56,89.03 0 top
R88  10k  [0603]  25.4,89.54 180 top
R89  2.2k  [0603]  18.41,92.84 180 top
R90  2.2k  [0603]  18.41,91.31 180 top
R91  10k  [0603]  62.48,104.39 270 top
R92  10k  [0603]  73.66,94.62 0 top
R93  10k  [0603]  73.66,96.27 0 top
R94  1k  [0603]  59.82,92.2 180 top
R95  1k  [0603]  59.94,102.23 0 top
R96  10k  [0603]  59.82,89.03 0 top
R97  10k  [0603]  73.66,89.54 180 top
R98  2.2k  [0603]  66.67,92.84 180 top
R99  2.2k  [0603]  66.67,91.31 180 top
R100  10k  [0603]  110.74,104.39 270 top
R101  10k  [0603]  121.92,94.62 0 top
R102  10k  [0603]  121.92,96.27 0 top
R103  1k  [0603]  108.08,92.2 180 top
R104  1k  [0603]  108.2,102.23 0 top
R105  10k  [0603]  108.08,89.03 0 top
R106  10k  [0603]  121.92,89.54 180 top
R107  2.2k  [0603]  114.94,92.84 180 top
R108  2.2k  [0603]  114.94,91.31 180 top
S1  RESET  [TACTILE_SWITCH_SMD_4.6X2.8MM]  11.68,30.35 180 top
S2  0  [TACTILE_SWITCH_SMD_4.6X2.8MM]  11.81,8.64 0 top
S3  RESET  [TACTILE_SWITCH_SMD_4.6X2.8MM]  59.94,30.35 180 top
S4  0  [TACTILE_SWITCH_SMD_4.6X2.8MM]  60.07,8.64 0 top
S5  RESET  [TACTILE_SWITCH_SMD_4.6X2.8MM]  108.2,30.35 180 top
S6  0  [TACTILE_SWITCH_SMD_4.6X2.8MM]  108.33,8.64 0 top
S7  RESET  [TACTILE_SWITCH_SMD_4.6X2.8MM]  11.68,56.26 180 top
S8  0  [TACTILE_SWITCH_SMD_4.6X2.8MM]  11.81,34.54 0 top
S9  RESET  [TACTILE_SWITCH_SMD_4.6X2.8MM]  59.94,56.26 180 top
S10  0  [TACTILE_SWITCH_SMD_4.6X2.8MM]  60.07,34.54 0 top
S11  RESET  [TACTILE_SWITCH_SMD_4.6X2.8MM]  108.2,56.26 180 top
S12  0  [TACTILE_SWITCH_SMD_4.6X2.8MM]  108.33,34.54 0 top
S13  RESET  [TACTILE_SWITCH_SMD_4.6X2.8MM]  11.68,82.17 180 top
S14  0  [TACTILE_SWITCH_SMD_4.6X2.8MM]  11.81,60.45 0 top
S15  RESET  [TACTILE_SWITCH_SMD_4.6X2.8MM]  59.94,82.17 180 top
S16  0  [TACTILE_SWITCH_SMD_4.6X2.8MM]  60.07,60.45 0 top
S17  RESET  [TACTILE_SWITCH_SMD_4.6X2.8MM]  108.2,82.17 180 top
S18  0  [TACTILE_SWITCH_SMD_4.6X2.8MM]  108.33,60.45 0 top
S19  RESET  [TACTILE_SWITCH_SMD_4.6X2.8MM]  11.68,108.08 180 top
S20  0  [TACTILE_SWITCH_SMD_4.6X2.8MM]  11.81,86.36 0 top
S21  RESET  [TACTILE_SWITCH_SMD_4.6X2.8MM]  59.94,108.08 180 top
S22  0  [TACTILE_SWITCH_SMD_4.6X2.8MM]  60.07,86.36 0 top
S23  RESET  [TACTILE_SWITCH_SMD_4.6X2.8MM]  108.2,108.08 180 top
S24  0  [TACTILE_SWITCH_SMD_4.6X2.8MM]  108.33,86.36 0 top
U1  3.3V  [SOT23-5]  19.69,29.08 0 top
U2  ESP-WROOM-32NARROW  [ESP-WROOM-32-NARROW]  40.39,19.56 0 top
U3  CH340C  [SO016]  19.05,21.59 270 top
U4  RFM95W  [RFM95/96/97/98W]  39.37,19.56 90 bottom
U5  ESP-WROOM-32NARROW  [ESP-WROOM-32-NARROW]  88.65,19.56 0 top
U6  RFM95W  [RFM95/96/97/98W]  87.63,19.56 90 bottom
U7  3.3V  [SOT23-5]  67.94,29.08 0 top
U8  CH340C  [SO016]  67.31,21.59 270 top
U9  ESP-WROOM-32NARROW  [ESP-WROOM-32-NARROW]  136.91,19.56 0 top
U10  RFM95W  [RFM95/96/97/98W]  135.89,19.56 90 bottom
U11  3.3V  [SOT23-5]  116.2,29.08 0 top
U12  CH340C  [SO016]  115.57,21.59 270 top
U13  ESP-WROOM-32NARROW  [ESP-WROOM-32-NARROW]  40.39,45.47 0 top
U14  RFM95W  [RFM95/96/97/98W]  39.37,45.47 90 bottom
U15  3.3V  [SOT23-5]  19.69,54.99 0 top
U16  CH340C  [SO016]  19.05,47.5 270 top
U17  ESP-WROOM-32NARROW  [ESP-WROOM-32-NARROW]  88.65,45.47 0 top
U18  RFM95W  [RFM95/96/97/98W]  87.63,45.47 90 bottom
U19  3.3V  [SOT23-5]  67.94,54.99 0 top
U20  CH340C  [SO016]  67.31,47.5 270 top
U21  ESP-WROOM-32NARROW  [ESP-WROOM-32-NARROW]  136.91,45.47 0 top
U22  RFM95W  [RFM95/96/97/98W]  135.89,45.47 90 bottom
U23  3.3V  [SOT23-5]  116.2,54.99 0 top
U24  CH340C  [SO016]  115.57,47.5 270 top
U25  ESP-WROOM-32NARROW  [ESP-WROOM-32-NARROW]  40.39,71.37 0 top
U26  RFM95W  [RFM95/96/97/98W]  39.37,71.37 90 bottom
U27  3.3V  [SOT23-5]  19.69,80.9 0 top
U28  CH340C  [SO016]  19.05,73.41 270 top
U29  ESP-WROOM-32NARROW  [ESP-WROOM-32-NARROW]  88.65,71.37 0 top
U30  RFM95W  [RFM95/96/97/98W]  87.63,71.37 90 bottom
U31  3.3V  [SOT23-5]  67.94,80.9 0 top
U32  CH340C  [SO016]  67.31,73.41 270 top
U33  ESP-WROOM-32NARROW  [ESP-WROOM-32-NARROW]  136.91,71.37 0 top
U34  RFM95W  [RFM95/96/97/98W]  135.89,71.37 90 bottom
U35  3.3V  [SOT23-5]  116.2,80.9 0 top
U36  CH340C  [SO016]  115.57,73.41 270 top
U37  ESP-WROOM-32NARROW  [ESP-WROOM-32-NARROW]  40.39,97.28 0 top
U38  RFM95W  [RFM95/96/97/98W]  39.37,97.28 90 bottom
U39  3.3V  [SOT23-5]  19.69,106.81 0 top
U40  CH340C  [SO016]  19.05,99.31 270 top
U41  ESP-WROOM-32NARROW  [ESP-WROOM-32-NARROW]  88.65,97.28 0 top
U42  RFM95W  [RFM95/96/97/98W]  87.63,97.28 90 bottom
U43  3.3V  [SOT23-5]  67.94,106.81 0 top
U44  CH340C  [SO016]  67.31,99.31 270 top
U45  ESP-WROOM-32NARROW  [ESP-WROOM-32-NARROW]  136.91,97.28 0 top
U46  RFM95W  [RFM95/96/97/98W]  135.89,97.28 90 bottom
U47  3.3V  [SOT23-5]  116.2,106.81 0 top
U48  CH340C  [SO016]  115.57,99.31 270 top
U$1  [GND0]  48.83,29.34 180 top
U$2  [3V31]  46.23,29.34 180 top
U$3  [RST2]  43.5,29.34 180 top
U$4  [2517]  40.89,29.34 180 top
U$5  [279]  38.23,29.34 180 top
U$6  [SCK3]  35.88,29.34 180 top
U$7  [MISO4]  33.78,29.34 180 top
U$8  [MOSI5]  30.99,29.34 180 top
U$9  [ANT6]  25.65,32.74 270 top
U$10  [GND0]  48.83,9.72 180 top
U$11  [TX16]  46.23,9.72 180 top
U$12  [RX15]  43.56,9.84 180 top
U$13  [2314]  40.96,9.72 180 top
U$14  [1912]  38.23,9.72 180 top
U$15  [1811]  35.69,9.72 180 top
U$16  [513]  32.83,9.72 180 top
U$17  [410]  30.42,9.72 180 top
U$18  [SCL8]  28.19,9.72 180 top
U$19  [SDA7]  25.65,9.72 180 top
U$20  [RST2]  14.8,31.94 270 top
U$21  [020]  14.99,9.84 270 top
U$22  [PWR19]  9.65,28.32 270 top
U$23  [1722]  9.53,14.16 270 top
U$24  [U#FL0]  24.89,28.83 0 top
U$25  [ESP32_LORA_1#CH_GATEWAY21]  23.05,28.32 270 top
U$26  [GND0]  48.83,9.72 0 bottom
U$27  [TX16]  46.23,9.72 0 bottom
U$28  [RX15]  43.56,9.84 0 bottom
U$29  [2314]  40.96,9.72 0 bottom
U$30  [1912]  38.23,9.72 0 bottom
U$31  [1811]  35.69,9.72 0 bottom
U$32  [513]  32.83,9.72 0 bottom
U$33  [410]  30.42,9.72 0 bottom
U$34  [SCL8]  28.32,9.84 0 bottom
U$35  [SDA7]  25.91,9.84 0 bottom
U$36  [ANT6]  25.65,28.85 90 bottom
U$37  [GND0]  48.83,29.34 0 bottom
U$38  [3V31]  46.23,29.34 0 bottom
U$39  [RST2]  43.5,29.34 0 bottom
U$40  [2517]  40.89,29.34 0 bottom
U$41  [279]  38.23,29.34 0 bottom
U$42  [SCK3]  35.88,29.34 0 bottom
U$43  [MISO4]  33.78,29.34 0 bottom
U$44  [MOSI5]  30.99,29.34 0 bottom
U$45  [ESP32_LORA_1#CH_GATEWAY23]  12.57,8.38 90 bottom
U$46  [QWIIC_COPYRIGHT_SMALL]  19.05,8.13 0 bottom
U$47  [ANT6]  73.91,32.74 270 top
U$48  [GND0]  97.09,29.34 180 top
U$49  [3V31]  94.49,29.34 180 top
U$50  [RST2]  91.76,29.34 180 top
U$51  [2517]  89.15,29.34 180 top
U$52  [279]  86.49,29.34 180 top
U$53  [SCK3]  84.14,29.34 180 top
U$54  [MISO4]  82.04,29.34 180 top
U$55  [MOSI5]  79.25,29.34 180 top
U$56  [GND0]  97.09,9.72 180 top
U$57  [TX16]  94.49,9.72 180 top
U$58  [RX15]  91.82,9.84 180 top
U$59  [2314]  89.22,9.72 180 top
U$60  [1912]  86.49,9.72 180 top
U$61  [1811]  83.95,9.72 180 top
U$62  [513]  81.09,9.72 180 top
U$63  [410]  78.68,9.72 180 top
U$64  [SCL8]  76.45,9.72 180 top
U$65  [SDA7]  73.91,9.72 180 top
U$66  [RST2]  63.06,31.94 270 top
U$67  [020]  63.25,9.84 270 top
U$68  [PWR19]  57.91,28.32 270 top
U$69  [1722]  57.79,14.16 270 top
U$70  [ESP32_LORA_1#CH_GATEWAY21]  71.31,28.32 270 top
U$71  [GND0]  97.09,9.72 0 bottom
U$72  [TX16]  94.49,9.72 0 bottom
U$73  [RX15]  91.82,9.84 0 bottom
U$74  [2314]  89.22,9.72 0 bottom
U$75  [1912]  86.49,9.72 0 bottom
U$76  [1811]  83.95,9.72 0 bottom
U$77  [513]  81.09,9.72 0 bottom
U$78  [410]  78.68,9.72 0 bottom
U$79  [SCL8]  76.58,9.84 0 bottom
U$80  [SDA7]  74.17,9.84 0 bottom
U$81  [ANT6]  73.91,28.85 90 bottom
U$82  [GND0]  97.09,29.34 0 bottom
U$83  [3V31]  94.49,29.34 0 bottom
U$84  [RST2]  91.76,29.34 0 bottom
U$85  [2517]  89.15,29.34 0 bottom
U$86  [279]  86.49,29.34 0 bottom
U$87  [SCK3]  84.14,29.34 0 bottom
U$88  [MISO4]  82.04,29.34 0 bottom
U$89  [MOSI5]  79.25,29.34 0 bottom
U$90  [ESP32_LORA_1#CH_GATEWAY23]  60.83,8.38 90 bottom
U$91  [QWIIC_COPYRIGHT_SMALL]  67.31,8.13 0 bottom
U$92  [U#FL0]  73.15,28.83 0 top
U$93  [ANT6]  122.17,32.74 270 top
U$94  [GND0]  145.35,29.34 180 top
U$95  [3V31]  142.75,29.34 180 top
U$96  [RST2]  140.02,29.34 180 top
U$97  [2517]  137.41,29.34 180 top
U$98  [279]  134.75,29.34 180 top
U$99  [SCK3]  132.4,29.34 180 top
U$100  [MISO4]  130.3,29.34 180 top
U$101  [MOSI5]  127.51,29.34 180 top
U$102  [GND0]  145.35,9.72 180 top
U$103  [TX16]  142.75,9.72 180 top
U$104  [RX15]  140.08,9.84 180 top
U$105  [2314]  137.48,9.72 180 top
U$106  [1912]  134.75,9.72 180 top
U$107  [1811]  132.21,9.72 180 top
U$108  [513]  129.35,9.72 180 top
U$109  [410]  126.94,9.72 180 top
U$110  [SCL8]  124.71,9.72 180 top
U$111  [SDA7]  122.17,9.72 180 top
U$112  [RST2]  111.32,31.94 270 top
U$113  [020]  111.51,9.84 270 top
U$114  [PWR19]  106.17,28.32 270 top
U$115  [1722]  106.05,14.16 270 top
U$116  [ESP32_LORA_1#CH_GATEWAY21]  119.57,28.32 270 top
U$117  [GND0]  145.35,9.72 0 bottom
U$118  [TX16]  142.75,9.72 0 bottom
U$119  [RX15]  140.08,9.84 0 bottom
U$120  [2314]  137.48,9.72 0 bottom
U$121  [1912]  134.75,9.72 0 bottom
U$122  [1811]  132.21,9.72 0 bottom
U$123  [513]  129.35,9.72 0 bottom
U$124  [410]  126.94,9.72 0 bottom
U$125  [SCL8]  124.84,9.84 0 bottom
U$126  [SDA7]  122.43,9.84 0 bottom
U$127  [ANT6]  122.17,28.85 90 bottom
U$128  [GND0]  145.35,29.34 0 bottom
U$129  [3V31]  142.75,29.34 0 bottom
U$130  [RST2]  140.02,29.34 0 bottom
U$131  [2517]  137.41,29.34 0 bottom
U$132  [279]  134.75,29.34 0 bottom
U$133  [SCK3]  132.4,29.34 0 bottom
U$134  [MISO4]  130.3,29.34 0 bottom
U$135  [MOSI5]  127.51,29.34 0 bottom
U$136  [ESP32_LORA_1#CH_GATEWAY23]  109.09,8.38 90 bottom
U$137  [QWIIC_COPYRIGHT_SMALL]  115.57,8.13 0 bottom
U$138  [U#FL0]  121.41,28.83 0 top
U$139  [ANT6]  25.65,58.65 270 top
U$140  [GND0]  48.83,55.24 180 top
U$141  [3V31]  46.23,55.24 180 top
U$142  [RST2]  43.5,55.24 180 top
U$143  [2517]  40.89,55.24 180 top
U$144  [279]  38.23,55.24 180 top
U$145  [SCK3]  35.88,55.24 180 top
U$146  [MISO4]  33.78,55.24 180 top
U$147  [MOSI5]  30.99,55.24 180 top
U$148  [GND0]  48.83,35.62 180 top
U$149  [TX16]  46.23,35.62 180 top
U$150  [RX15]  43.56,35.75 180 top
U$151  [2314]  40.96,35.62 180 top
U$152  [1912]  38.23,35.62 180 top
U$153  [1811]  35.69,35.62 180 top
U$154  [513]  32.83,35.62 180 top
U$155  [410]  30.42,35.62 180 top
U$156  [SCL8]  28.19,35.62 180 top
U$157  [SDA7]  25.65,35.62 180 top
U$158  [RST2]  14.8,57.85 270 top
U$159  [020]  14.99,35.75 270 top
U$160  [PWR19]  9.65,54.23 270 top
U$161  [1722]  9.53,40.07 270 top
U$162  [ESP32_LORA_1#CH_GATEWAY21]  23.05,54.23 270 top
U$163  [GND0]  48.83,35.62 0 bottom
U$164  [TX16]  46.23,35.62 0 bottom
U$165  [RX15]  43.56,35.75 0 bottom
U$166  [2314]  40.96,35.62 0 bottom
U$167  [1912]  38.23,35.62 0 bottom
U$168  [1811]  35.69,35.62 0 bottom
U$169  [513]  32.83,35.62 0 bottom
U$170  [410]  30.42,35.62 0 bottom
U$171  [SCL8]  28.32,35.75 0 bottom
U$172  [SDA7]  25.91,35.75 0 bottom
U$173  [ANT6]  25.65,54.76 90 bottom
U$174  [GND0]  48.83,55.24 0 bottom
U$175  [3V31]  46.23,55.24 0 bottom
U$176  [RST2]  43.5,55.24 0 bottom
U$177  [2517]  40.89,55.24 0 bottom
U$178  [279]  38.23,55.24 0 bottom
U$179  [SCK3]  35.88,55.24 0 bottom
U$180  [MISO4]  33.78,55.24 0 bottom
U$181  [MOSI5]  30.99,55.24 0 bottom
U$182  [ESP32_LORA_1#CH_GATEWAY23]  12.57,34.29 90 bottom
U$183  [QWIIC_COPYRIGHT_SMALL]  19.05,34.04 0 bottom
U$184  [U#FL0]  24.89,54.74 0 top
U$185  [ANT6]  73.91,58.65 270 top
U$186  [GND0]  97.09,55.24 180 top
U$187  [3V31]  94.49,55.24 180 top
U$188  [RST2]  91.76,55.24 180 top
U$189  [2517]  89.15,55.24 180 top
U$190  [279]  86.49,55.24 180 top
U$191  [SCK3]  84.14,55.24 180 top
U$192  [MISO4]  82.04,55.24 180 top
U$193  [MOSI5]  79.25,55.24 180 top
U$194  [GND0]  97.09,35.62 180 top
U$195  [TX16]  94.49,35.62 180 top
U$196  [RX15]  91.82,35.75 180 top
U$197  [2314]  89.22,35.62 180 top
U$198  [1912]  86.49,35.62 180 top
U$199  [1811]  83.95,35.62 180 top
U$200  [513]  81.09,35.62 180 top
U$201  [410]  78.68,35.62 180 top
U$202  [SCL8]  76.45,35.62 180 top
U$203  [SDA7]  73.91,35.62 180 top
U$204  [RST2]  63.06,57.85 270 top
U$205  [020]  63.25,35.75 270 top
U$206  [PWR19]  57.91,54.23 270 top
U$207  [1722]  57.79,40.07 270 top
U$208  [ESP32_LORA_1#CH_GATEWAY21]  71.31,54.23 270 top
U$209  [GND0]  97.09,35.62 0 bottom
U$210  [TX16]  94.49,35.62 0 bottom
U$211  [RX15]  91.82,35.75 0 bottom
U$212  [2314]  89.22,35.62 0 bottom
U$213  [1912]  86.49,35.62 0 bottom
U$214  [1811]  83.95,35.62 0 bottom
U$215  [513]  81.09,35.62 0 bottom
U$216  [410]  78.68,35.62 0 bottom
U$217  [SCL8]  76.58,35.75 0 bottom
U$218  [SDA7]  74.17,35.75 0 bottom
U$219  [ANT6]  73.91,54.76 90 bottom
U$220  [GND0]  97.09,55.24 0 bottom
U$221  [3V31]  94.49,55.24 0 bottom
U$222  [RST2]  91.76,55.24 0 bottom
U$223  [2517]  89.15,55.24 0 bottom
U$224  [279]  86.49,55.24 0 bottom
U$225  [SCK3]  84.14,55.24 0 bottom
U$226  [MISO4]  82.04,55.24 0 bottom
U$227  [MOSI5]  79.25,55.24 0 bottom
U$228  [ESP32_LORA_1#CH_GATEWAY23]  60.83,34.29 90 bottom
U$229  [QWIIC_COPYRIGHT_SMALL]  67.31,34.04 0 bottom
U$230  [U#FL0]  73.15,54.74 0 top
U$231  [ANT6]  122.17,58.65 270 top
U$232  [GND0]  145.35,55.24 180 top
U$233  [3V31]  142.75,55.24 180 top
U$234  [RST2]  140.02,55.24 180 top
U$235  [2517]  137.41,55.24 180 top
U$236  [279]  134.75,55.24 180 top
U$237  [SCK3]  132.4,55.24 180 top
U$238  [MISO4]  130.3,55.24 180 top
U$239  [MOSI5]  127.51,55.24 180 top
U$240  [GND0]  145.35,35.62 180 top
U$241  [TX16]  142.75,35.62 180 top
U$242  [RX15]  140.08,35.75 180 top
U$243  [2314]  137.48,35.62 180 top
U$244  [1912]  134.75,35.62 180 top
U$245  [1811]  132.21,35.62 180 top
U$246  [513]  129.35,35.62 180 top
U$247  [410]  126.94,35.62 180 top
U$248  [SCL8]  124.71,35.62 180 top
U$249  [SDA7]  122.17,35.62 180 top
U$250  [RST2]  111.32,57.85 270 top
U$251  [020]  111.51,35.75 270 top
U$252  [PWR19]  106.17,54.23 270 top
U$253  [1722]  106.05,40.07 270 top
U$254  [ESP32_LORA_1#CH_GATEWAY21]  119.57,54.23 270 top
U$255  [GND0]  145.35,35.62 0 bottom
U$256  [TX16]  142.75,35.62 0 bottom
U$257  [RX15]  140.08,35.75 0 bottom
U$258  [2314]  137.48,35.62 0 bottom
U$259  [1912]  134.75,35.62 0 bottom
U$260  [1811]  132.21,35.62 0 bottom
U$261  [513]  129.35,35.62 0 bottom
U$262  [410]  126.94,35.62 0 bottom
U$263  [SCL8]  124.84,35.75 0 bottom
U$264  [SDA7]  122.43,35.75 0 bottom
U$265  [ANT6]  122.17,54.76 90 bottom
U$266  [GND0]  145.35,55.24 0 bottom
U$267  [3V31]  142.75,55.24 0 bottom
U$268  [RST2]  140.02,55.24 0 bottom
U$269  [2517]  137.41,55.24 0 bottom
U$270  [279]  134.75,55.24 0 bottom
U$271  [SCK3]  132.4,55.24 0 bottom
U$272  [MISO4]  130.3,55.24 0 bottom
U$273  [MOSI5]  127.51,55.24 0 bottom
U$274  [ESP32_LORA_1#CH_GATEWAY23]  109.09,34.29 90 bottom
U$275  [QWIIC_COPYRIGHT_SMALL]  115.57,34.04 0 bottom
U$276  [U#FL0]  121.41,54.74 0 top
U$277  [ANT6]  25.65,84.56 270 top
U$278  [GND0]  48.83,81.15 180 top
U$279  [3V31]  46.23,81.15 180 top
U$280  [RST2]  43.5,81.15 180 top
U$281  [2517]  40.89,81.15 180 top
U$282  [279]  38.23,81.15 180 top
U$283  [SCK3]  35.88,81.15 180 top
U$284  [MISO4]  33.78,81.15 180 top
U$285  [MOSI5]  30.99,81.15 180 top
U$286  [GND0]  48.83,61.53 180 top
U$287  [TX16]  46.23,61.53 180 top
U$288  [RX15]  43.56,61.66 180 top
U$289  [2314]  40.96,61.53 180 top
U$290  [1912]  38.23,61.53 180 top
U$291  [1811]  35.69,61.53 180 top
U$292  [513]  32.83,61.53 180 top
U$293  [410]  30.42,61.53 180 top
U$294  [SCL8]  28.19,61.53 180 top
U$295  [SDA7]  25.65,61.53 180 top
U$296  [RST2]  14.8,83.76 270 top
U$297  [020]  14.99,61.66 270 top
U$298  [PWR19]  9.65,80.14 270 top
U$299  [1722]  9.53,65.98 270 top
U$300  [ESP32_LORA_1#CH_GATEWAY21]  23.05,80.14 270 top
U$301  [GND0]  48.83,61.53 0 bottom
U$302  [TX16]  46.23,61.53 0 bottom
U$303  [RX15]  43.56,61.66 0 bottom
U$304  [2314]  40.96,61.53 0 bottom
U$305  [1912]  38.23,61.53 0 bottom
U$306  [1811]  35.69,61.53 0 bottom
U$307  [513]  32.83,61.53 0 bottom
U$308  [410]  30.42,61.53 0 bottom
U$309  [SCL8]  28.32,61.66 0 bottom
U$310  [SDA7]  25.91,61.66 0 bottom
U$311  [ANT6]  25.65,80.67 90 bottom
U$312  [GND0]  48.83,81.15 0 bottom
U$313  [3V31]  46.23,81.15 0 bottom
U$314  [RST2]  43.5,81.15 0 bottom
U$315  [2517]  40.89,81.15 0 bottom
U$316  [279]  38.23,81.15 0 bottom
U$317  [SCK3]  35.88,81.15 0 bottom
U$318  [MISO4]  33.78,81.15 0 bottom
U$319  [MOSI5]  30.99,81.15 0 bottom
U$320  [ESP32_LORA_1#CH_GATEWAY23]  12.57,60.2 90 bottom
U$321  [QWIIC_COPYRIGHT_SMALL]  19.05,59.94 0 bottom
U$322  [U#FL0]  24.89,80.65 0 top
U$323  [ANT6]  73.91,84.56 270 top
U$324  [GND0]  97.09,81.15 180 top
U$325  [3V31]  94.49,81.15 180 top
U$326  [RST2]  91.76,81.15 180 top
U$327  [2517]  89.15,81.15 180 top
U$328  [279]  86.49,81.15 180 top
U$329  [SCK3]  84.14,81.15 180 top
U$330  [MISO4]  82.04,81.15 180 top
U$331  [MOSI5]  79.25,81.15 180 top
U$332  [GND0]  97.09,61.53 180 top
U$333  [TX16]  94.49,61.53 180 top
U$334  [RX15]  91.82,61.66 180 top
U$335  [2314]  89.22,61.53 180 top
U$336  [1912]  86.49,61.53 180 top
U$337  [1811]  83.95,61.53 180 top
U$338  [513]  81.09,61.53 180 top
U$339  [410]  78.68,61.53 180 top
U$340  [SCL8]  76.45,61.53 180 top
U$341  [SDA7]  73.91,61.53 180 top
U$342  [RST2]  63.06,83.76 270 top
U$343  [020]  63.25,61.66 270 top
U$344  [PWR19]  57.91,80.14 270 top
U$345  [1722]  57.79,65.98 270 top
U$346  [ESP32_LORA_1#CH_GATEWAY21]  71.31,80.14 270 top
U$347  [GND0]  97.09,61.53 0 bottom
U$348  [TX16]  94.49,61.53 0 bottom
U$349  [RX15]  91.82,61.66 0 bottom
U$350  [2314]  89.22,61.53 0 bottom
U$351  [1912]  86.49,61.53 0 bottom
U$352  [1811]  83.95,61.53 0 bottom
U$353  [513]  81.09,61.53 0 bottom
U$354  [410]  78.68,61.53 0 bottom
U$355  [SCL8]  76.58,61.66 0 bottom
U$356  [SDA7]  74.17,61.66 0 bottom
U$357  [ANT6]  73.91,80.67 90 bottom
U$358  [GND0]  97.09,81.15 0 bottom
U$359  [3V31]  94.49,81.15 0 bottom
U$360  [RST2]  91.76,81.15 0 bottom
U$361  [2517]  89.15,81.15 0 bottom
U$362  [279]  86.49,81.15 0 bottom
U$363  [SCK3]  84.14,81.15 0 bottom
U$364  [MISO4]  82.04,81.15 0 bottom
U$365  [MOSI5]  79.25,81.15 0 bottom
U$366  [ESP32_LORA_1#CH_GATEWAY23]  60.83,60.2 90 bottom
U$367  [QWIIC_COPYRIGHT_SMALL]  67.31,59.94 0 bottom
U$368  [U#FL0]  73.15,80.65 0 top
U$369  [ANT6]  122.17,84.56 270 top
U$370  [GND0]  145.35,81.15 180 top
U$371  [3V31]  142.75,81.15 180 top
U$372  [RST2]  140.02,81.15 180 top
U$373  [2517]  137.41,81.15 180 top
U$374  [279]  134.75,81.15 180 top
U$375  [SCK3]  132.4,81.15 180 top
U$376  [MISO4]  130.3,81.15 180 top
U$377  [MOSI5]  127.51,81.15 180 top
U$378  [GND0]  145.35,61.53 180 top
U$379  [TX16]  142.75,61.53 180 top
U$380  [RX15]  140.08,61.66 180 top
U$381  [2314]  137.48,61.53 180 top
U$382  [1912]  134.75,61.53 180 top
U$383  [1811]  132.21,61.53 180 top
U$384  [513]  129.35,61.53 180 top
U$385  [410]  126.94,61.53 180 top
U$386  [SCL8]  124.71,61.53 180 top
U$387  [SDA7]  122.17,61.53 180 top
U$388  [RST2]  111.32,83.76 270 top
U$389  [020]  111.51,61.66 270 top
U$390  [PWR19]  106.17,80.14 270 top
U$391  [1722]  106.05,65.98 270 top
U$392  [ESP32_LORA_1#CH_GATEWAY21]  119.57,80.14 270 top
U$393  [GND0]  145.35,61.53 0 bottom
U$394  [TX16]  142.75,61.53 0 bottom
U$395  [RX15]  140.08,61.66 0 bottom
U$396  [2314]  137.48,61.53 0 bottom
U$397  [1912]  134.75,61.53 0 bottom
U$398  [1811]  132.21,61.53 0 bottom
U$399  [513]  129.35,61.53 0 bottom
U$400  [410]  126.94,61.53 0 bottom
U$401  [SCL8]  124.84,61.66 0 bottom
U$402  [SDA7]  122.43,61.66 0 bottom
U$403  [ANT6]  122.17,80.67 90 bottom
U$404  [GND0]  145.35,81.15 0 bottom
U$405  [3V31]  142.75,81.15 0 bottom
U$406  [RST2]  140.02,81.15 0 bottom
U$407  [2517]  137.41,81.15 0 bottom
U$408  [279]  134.75,81.15 0 bottom
U$409  [SCK3]  132.4,81.15 0 bottom
U$410  [MISO4]  130.3,81.15 0 bottom
U$411  [MOSI5]  127.51,81.15 0 bottom
U$412  [ESP32_LORA_1#CH_GATEWAY23]  109.09,60.2 90 bottom
U$413  [QWIIC_COPYRIGHT_SMALL]  115.57,59.94 0 bottom
U$414  [U#FL0]  121.41,80.65 0 top
U$415  [ANT6]  25.65,110.46 270 top
U$416  [GND0]  48.83,107.06 180 top
U$417  [3V31]  46.23,107.06 180 top
U$418  [RST2]  43.5,107.06 180 top
U$419  [2517]  40.89,107.06 180 top
U$420  [279]  38.23,107.06 180 top
U$421  [SCK3]  35.88,107.06 180 top
U$422  [MISO4]  33.78,107.06 180 top
U$423  [MOSI5]  30.99,107.06 180 top
U$424  [GND0]  48.83,87.44 180 top
U$425  [TX16]  46.23,87.44 180 top
U$426  [RX15]  43.56,87.57 180 top
U$427  [2314]  40.96,87.44 180 top
U$428  [1912]  38.23,87.44 180 top
U$429  [1811]  35.69,87.44 180 top
U$430  [513]  32.83,87.44 180 top
U$431  [410]  30.42,87.44 180 top
U$432  [SCL8]  28.19,87.44 180 top
U$433  [SDA7]  25.65,87.44 180 top
U$434  [RST2]  14.8,109.66 270 top
U$435  [020]  14.99,87.57 270 top
U$436  [PWR19]  9.65,106.05 270 top
U$437  [1722]  9.53,91.88 270 top
U$438  [ESP32_LORA_1#CH_GATEWAY21]  23.05,106.05 270 top
U$439  [GND0]  48.83,87.44 0 bottom
U$440  [TX16]  46.23,87.44 0 bottom
U$441  [RX15]  43.56,87.57 0 bottom
U$442  [2314]  40.96,87.44 0 bottom
U$443  [1912]  38.23,87.44 0 bottom
U$444  [1811]  35.69,87.44 0 bottom
U$445  [513]  32.83,87.44 0 bottom
U$446  [410]  30.42,87.44 0 bottom
U$447  [SCL8]  28.32,87.57 0 bottom
U$448  [SDA7]  25.91,87.57 0 bottom
U$449  [ANT6]  25.65,106.58 90 bottom
U$450  [GND0]  48.83,107.06 0 bottom
U$451  [3V31]  46.23,107.06 0 bottom
U$452  [RST2]  43.5,107.06 0 bottom
U$453  [2517]  40.89,107.06 0 bottom
U$454  [279]  38.23,107.06 0 bottom
U$455  [SCK3]  35.88,107.06 0 bottom
U$456  [MISO4]  33.78,107.06 0 bottom
U$457  [MOSI5]  30.99,107.06 0 bottom
U$458  [ESP32_LORA_1#CH_GATEWAY23]  12.57,86.11 90 bottom
U$459  [QWIIC_COPYRIGHT_SMALL]  19.05,85.85 0 bottom
U$460  [U#FL0]  24.89,106.55 0 top
U$461  [ANT6]  73.91,110.46 270 top
U$462  [GND0]  97.09,107.06 180 top
U$463  [3V31]  94.49,107.06 180 top
U$464  [RST2]  91.76,107.06 180 top
U$465  [2517]  89.15,107.06 180 top
U$466  [279]  86.49,107.06 180 top
U$467  [SCK3]  84.14,107.06 180 top
U$468  [MISO4]  82.04,107.06 180 top
U$469  [MOSI5]  79.25,107.06 180 top
U$470  [GND0]  97.09,87.44 180 top
U$471  [TX16]  94.49,87.44 180 top
U$472  [RX15]  91.82,87.57 180 top
U$473  [2314]  89.22,87.44 180 top
U$474  [1912]  86.49,87.44 180 top
U$475  [1811]  83.95,87.44 180 top
U$476  [513]  81.09,87.44 180 top
U$477  [410]  78.68,87.44 180 top
U$478  [SCL8]  76.45,87.44 180 top
U$479  [SDA7]  73.91,87.44 180 top
U$480  [RST2]  63.06,109.66 270 top
U$481  [020]  63.25,87.57 270 top
U$482  [PWR19]  57.91,106.05 270 top
U$483  [1722]  57.79,91.88 270 top
U$484  [ESP32_LORA_1#CH_GATEWAY21]  71.31,106.05 270 top
U$485  [GND0]  97.09,87.44 0 bottom
U$486  [TX16]  94.49,87.44 0 bottom
U$487  [RX15]  91.82,87.57 0 bottom
U$488  [2314]  89.22,87.44 0 bottom
U$489  [1912]  86.49,87.44 0 bottom
U$490  [1811]  83.95,87.44 0 bottom
U$491  [513]  81.09,87.44 0 bottom
U$492  [410]  78.68,87.44 0 bottom
U$493  [SCL8]  76.58,87.57 0 bottom
U$494  [SDA7]  74.17,87.57 0 bottom
U$495  [ANT6]  73.91,106.58 90 bottom
U$496  [GND0]  97.09,107.06 0 bottom
U$497  [3V31]  94.49,107.06 0 bottom
U$498  [RST2]  91.76,107.06 0 bottom
U$499  [2517]  89.15,107.06 0 bottom
U$500  [279]  86.49,107.06 0 bottom
U$501  [SCK3]  84.14,107.06 0 bottom
U$502  [MISO4]  82.04,107.06 0 bottom
U$503  [MOSI5]  79.25,107.06 0 bottom
U$504  [ESP32_LORA_1#CH_GATEWAY23]  60.83,86.11 90 bottom
U$505  [QWIIC_COPYRIGHT_SMALL]  67.31,85.85 0 bottom
U$506  [U#FL0]  73.15,106.55 0 top
U$507  [ANT6]  122.17,110.46 270 top
U$508  [GND0]  145.35,107.06 180 top
U$509  [3V31]  142.75,107.06 180 top
U$510  [RST2]  140.02,107.06 180 top
U$511  [2517]  137.41,107.06 180 top
U$512  [279]  134.75,107.06 180 top
U$513  [SCK3]  132.4,107.06 180 top
U$514  [MISO4]  130.3,107.06 180 top
U$515  [MOSI5]  127.51,107.06 180 top
U$516  [GND0]  145.35,87.44 180 top
U$517  [TX16]  142.75,87.44 180 top
U$518  [RX15]  140.08,87.57 180 top
U$519  [2314]  137.48,87.44 180 top
U$520  [1912]  134.75,87.44 180 top
U$521  [1811]  132.21,87.44 180 top
U$522  [513]  129.35,87.44 180 top
U$523  [410]  126.94,87.44 180 top
U$524  [SCL8]  124.71,87.44 180 top
U$525  [SDA7]  122.17,87.44 180 top
U$526  [RST2]  111.32,109.66 270 top
U$527  [020]  111.51,87.57 270 top
U$528  [PWR19]  106.17,106.05 270 top
U$529  [1722]  106.05,91.88 270 top
U$530  [ESP32_LORA_1#CH_GATEWAY21]  119.57,106.05 270 top
U$531  [GND0]  145.35,87.44 0 bottom
U$532  [TX16]  142.75,87.44 0 bottom
U$533  [RX15]  140.08,87.57 0 bottom
U$534  [2314]  137.48,87.44 0 bottom
U$535  [1912]  134.75,87.44 0 bottom
U$536  [1811]  132.21,87.44 0 bottom
U$537  [513]  129.35,87.44 0 bottom
U$538  [410]  126.94,87.44 0 bottom
U$539  [SCL8]  124.84,87.57 0 bottom
U$540  [SDA7]  122.43,87.57 0 bottom
U$541  [ANT6]  122.17,106.58 90 bottom
U$542  [GND0]  145.35,107.06 0 bottom
U$543  [3V31]  142.75,107.06 0 bottom
U$544  [RST2]  140.02,107.06 0 bottom
U$545  [2517]  137.41,107.06 0 bottom
U$546  [279]  134.75,107.06 0 bottom
U$547  [SCK3]  132.4,107.06 0 bottom
U$548  [MISO4]  130.3,107.06 0 bottom
U$549  [MOSI5]  127.51,107.06 0 bottom
U$550  [ESP32_LORA_1#CH_GATEWAY23]  109.09,86.11 90 bottom
U$551  [QWIIC_COPYRIGHT_SMALL]  115.57,85.85 0 bottom
U$552  [U#FL0]  121.41,106.55 0 top

## Library data of the parts
C1 C4 C9 C10 C16 C17 C23 C24 C30 C31 C37 C38 C44 C45 C51 C52 C58 C59 C65 C66 C72 C73 C79 C80 = SparkFun-Capacitors; PROD_ID: CAP-00868
C2 C3 C12 C13 C19 C20 C26 C27 C33 C34 C40 C41 C47 C48 C54 C55 C61 C62 C68 C69 C75 C76 C82 C83 = SparkFun-Capacitors; PROD_ID: CAP-00810
C5 C11 C18 C25 C32 C39 C46 C53 C60 C67 C74 C81 = SparkFun-Capacitors; PROD_ID: CAP-11015
C6 C8 C15 C22 C29 C36 C43 C50 C57 C64 C71 C78 = SparkFun-Capacitors; PROD_ID: CAP-08280
C7 C14 C21 C28 C35 C42 C49 C56 C63 C70 C77 C84 = SparkFun-Capacitors; PROD_ID: CAP-08604
D1 D4 D6 D8 D10 D12 D14 D16 D18 D20 D22 D24 = SparkFun-LED; PROD_ID: DIO-00819
D2 D3 D5 D7 D9 D11 D13 D15 D17 D19 D21 D23 = SparkFun-LED; PROD_ID: DIO-08575
E$1-E$4 FD1-FD48 LOGO1-LOGO24 = SparkFun-Aesthetics
E$5 E$6 = SparkFun-Retired
J1 J7 J13 J19 J25 J31 J37 J43 J49 J55 J61 J67 = SparkFun-Connectors; PROD_ID: CONN-13711
J2 J9 J15 J21 J27 J33 J39 J45 J51 J57 J63 J69 = SparkFun-Connectors; PROD_ID: CONN-09193; SF_ID: WRL-09144
J3 J10 J16 J22 J28 J34 J40 J46 J52 J58 J64 J70 = SparkFun-Connectors
J4 J12 J18 J24 J30 J36 J42 J48 J54 J60 J66 J72 = SparkFun-Connectors; PROD_ID: CONN-08438
J5 J11 J17 J23 J29 J35 J41 J47 J53 J59 J65 J71 = SparkFun-Connectors; PROD_ID: CONN-11563
J6 J8 J14 J20 J26 J32 J38 J44 J50 J56 J62 J68 = SparkFun-Connectors; PROD_ID: CONN-13694
JP1-JP12 = SparkFun-Jumpers
Q1-Q12 = SparkFun-DiscreteSemi; PROD_ID: TRANS-13337
R1 R4 R5 R7 R8 R10-R12 R15 R16 R19-R21 R24 R25 R28-R30 R33 R34 R37-R39 R42 R43 R46-R48 R51 R52 R55-R57 R60 R61 R64-R66 R69 R70 R73-R75 R78 R79 R82-R84 R87 R88 R91-R93 R96 R97 R100-R102 R105 R106 = SparkFun-Resistors; PROD_ID: RES-00824
R2 R3 R13 R14 R22 R23 R31 R32 R40 R41 R49 R50 R58 R59 R67 R68 R76 R77 R85 R86 R94 R95 R103 R104 = SparkFun-Resistors; PROD_ID: RES-07856
R6 R9 R17 R18 R26 R27 R35 R36 R44 R45 R53 R54 R62 R63 R71 R72 R80 R81 R89 R90 R98 R99 R107 R108 = SparkFun-Resistors; PROD_ID: RES-08272
S1-S24 = SparkFun-Switches; PROD_ID: SWCH-13065
U1 U7 U11 U15 U19 U23 U27 U31 U35 U39 U43 U47 = SparkFun-IC-Power; PROD_ID: VREG-12457
U2 U5 U9 U13 U17 U21 U25 U29 U33 U37 U41 U45 = SparkFun-RF; PROD_ID: IC-13849
U3 U8 U12 U16 U20 U24 U28 U32 U36 U40 U44 U48 = SparkFun-IC-Comms; PROD_ID: IC-14038
U4 U6 U10 U14 U18 U22 U26 U30 U34 U38 U42 U46 = SparkFun-RF; PROD_ID: IC-13959
U$1-U$23 U$25-U$45 U$47-U$90 U$93-U$136 U$139-U$182 U$185-U$228 U$231-U$274 U$277-U$320 U$323-U$366 U$369-U$412 U$415-U$458 U$461-U$504 U$507-U$550 = buzzard_labels
U$24 U$92 U$138 U$184 U$230 U$276 U$322 U$368 U$414 U$460 U$506 U$552 = buzzard_labels (1)
U$46 U$91 U$137 U$183 U$229 U$275 U$321 U$367 U$413 U$459 U$505 U$551 = Labels